# Altium PCB DYBoard_Feeder.PcbDoc
Units mm, origin at the board's own origin, x right, y up, seen from the top; angles counter-clockwise.
Board outline 152.4 x 101.6 mm, 2 copper layers (Top Layer, Bottom Layer); 20 components, 20 nets, 89 pads, 14 vias.
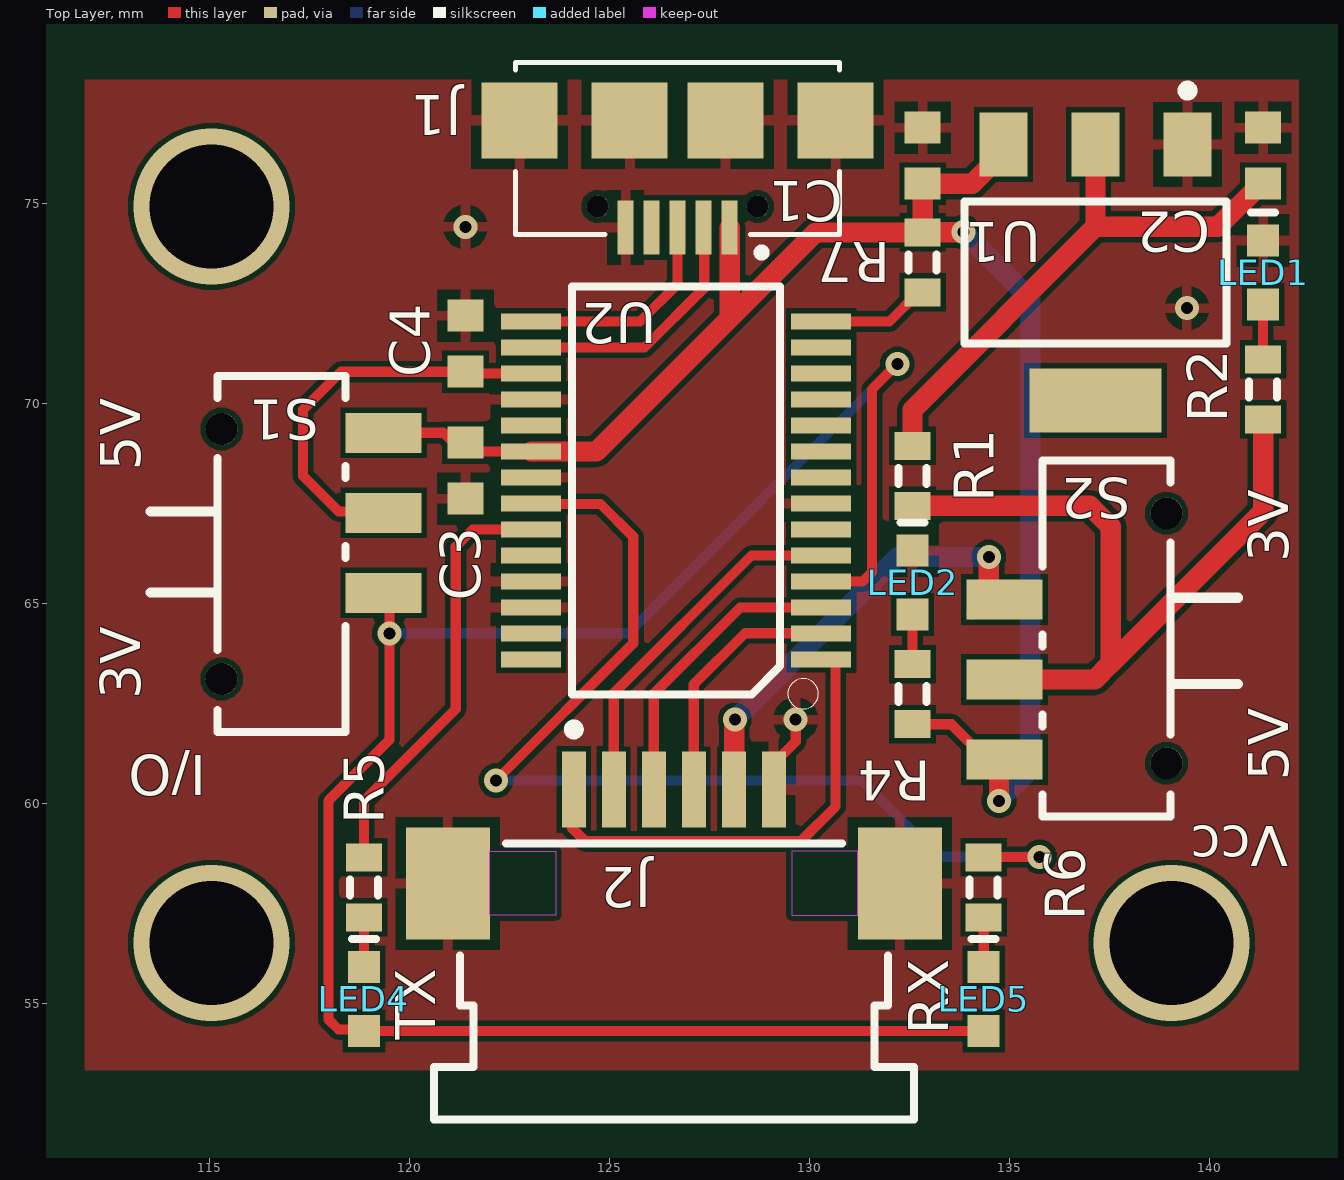
[diagram p0: Top Layer view]
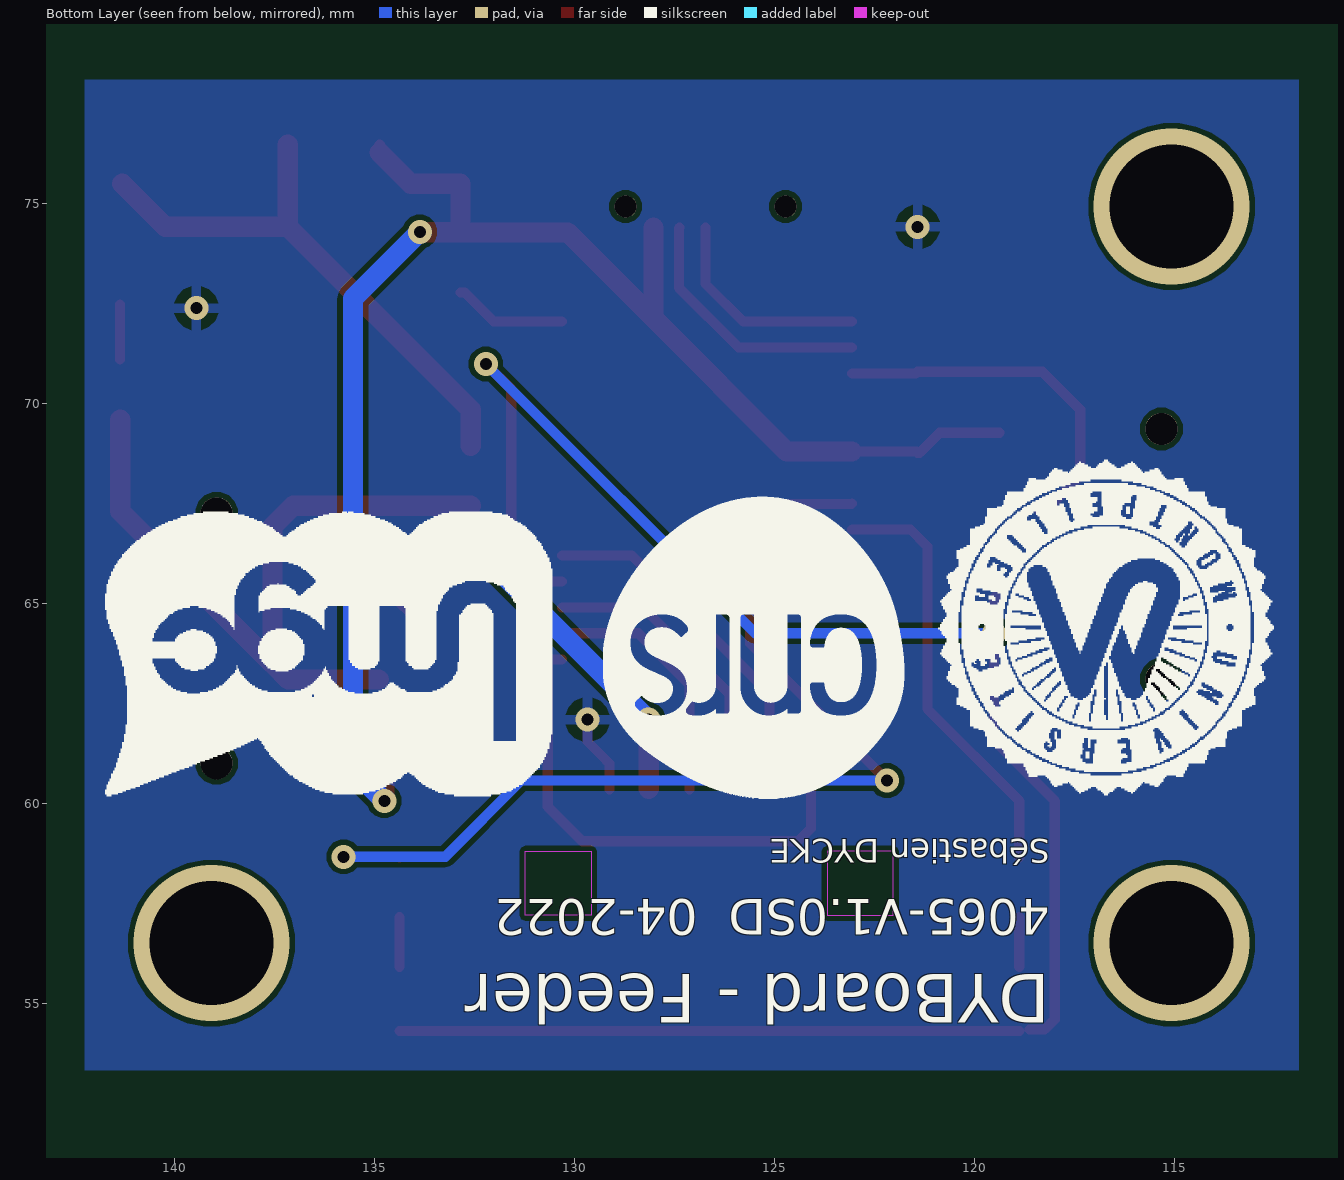
[diagram p1: Bottom Layer view, seen from below]

## Layer stack, top to bottom
Top Solder: solder mask 0.0102, Solder Resist, Dk 3.5
Top Layer: signal copper 0.0356
Dielectric 1: dielectric 0.32, FR-4, Dk 4.8
Bottom Layer: signal copper 0.0356
Bottom Solder: solder mask 0.0102, Solder Resist, Dk 3.5

## Board outline
25.4,25.4 177.8,25.4 177.8,127 25.4,127

## Design rules (kind name [scope] priority, off if disabled: settings)
Clearance [All] p1: gap=0.127 ignorepadtopadclearanceinfootprint=FALSE
PolygonConnect [All] p1: connectstyle=Relief reliefconductorwidth=0.254 reliefentries=4 polygonreliefangle="90 Angle" airgapwidth=0.254
RoutingVias [All] p1: holewidth=0.711 width=1.27 viastyle="Through Hole" minholewidth=0.711 minwidth=1.27 maxholewidth=0.711 maxwidth=1.27
SolderMaskExpansion [All] p1: expansion=0.102 istentingtop=FALSE
Width [All] p1: maxlimit=2 minlimit=0.254 preferedwidth=0.254
30 further rules are at their usual default settings.

## Components (designator, comment, footprint, x,y, rotation, side; value= is the part's Value field where it differs from the comment)
C1 "Cap Semi" 1608[0603] 132.842,76.2 r270 top value=10µF
C2 "Cap Semi" 1608[0603] 141.351,76.2 r270 top value=22µF
C3 "Cap Semi" 1608[0603] 121.412,68.326 r90 top value=10nF
C4 "Cap Semi" 1608[0603] 121.412,71.501 r270 top value=100nF
J1 "UJ2-MIBH-G-SMT-TR" CUI_UJ2-MIBH-G-SMT-TR 126.714,77.08 r180 top
J2 "52207-0633" MOLX-52207-0633 126.619,59.182 r0 top
LED1 "150060BS75000" 0603_A 141.351,73.279 r270 top
LED2 "150060BS75000" 0603_A 132.588,65.532 r270 top
LED4 "150060BS75000" 0603_A 118.872,55.118 r270 top
LED5 "150060BS75000" 0603_A 134.366,55.118 r270 top
R1 "Res3" J1-0603 132.588,68.199 r90 top value=0R
R2 "Res3" J1-0603 141.351,70.358 r90 top value=330R
R4 "Res3" J1-0603 132.588,62.738 r90 top value=330R
R5 "Res3" J1-0603 118.872,57.912 r270 top value=330R
R6 "Res3" J1-0603 134.366,57.912 r270 top value=330R
R7 "Res3" J1-0603 132.842,73.533 r90 top value=10K
S1 "450405020524" 450405020524 115.316,66.244 r270 top
S2 "450405020524" 450405020524 138.938,64.135 r90 top
U1 "AZ1117CH-3.3TRG1" FP-SOT223-MFG 137.16,73.279 r270 top
U2 "INTERFACE-FT232RL(SSOP28)" SSOP28-0.65-10.2X5.2MM 126.677,67.829 r90 top

## Footprints (in the part's own frame and the unit in brackets; to place one, negate y for a bottom-side part, rotate by r counter-clockwise, add the part's x,y. Pads: shape width x height; smd on the part's side, far side on the other; paste and mask are expansions set on the pad)
0603_A [mm] "Chip LED, 2-Leads, Body 1.6x0.8mm, IPC Medium Density"
  rect 0.8x0.8 smd: 1(-0.8,0) 2(0.8,0)
  silkscreen extent -1.5,-0.3 -1.5,0.3, body extent -0.8,-0.4 0.8,0.4, height 0.7
1608[0603] [mm] "Chip Capacitor, Body 1.6x0.8mm, IPC High Density"
  rect 0.8x0.9 smd: 1(-0.7,0) 2(0.7,0)
  body extent -0.87,-0.48 0.87,0.48, height 1.3
450405020524 [mm]
  rect 1x1.9 smd: 1(-3.03,4.05) 2(-1.03,4.05) 3(0.97,4.05)
  round 0.8 hole 0.8 unplated: ""(-3.125,0) ""(3.125,0)
  silkscreen extent -4.45,-0.1 4.45,3.1
CUI_UJ2-MIBH-G-SMT-TR [mm]
  rect 0.4x1.35 smd: 1(-1.3,2.675) 2(-0.65,2.675) 3(0,2.675) 4(0.65,2.675) 5(1.3,2.675)
  rect 1.9x1.9 smd: S1(-3.95,0) S2(-1.2,0) S3(1.2,0) S4(3.95,0)
  round 0.55 hole 0.55 unplated: ""(-2,2.15) ""(2,2.15)
  silkscreen extent -4.05,-1.45 4.05,3.4
FP-SOT223-MFG [mm]
  rect 1.6x1.2 smd paste+0 mask+0: 1(-3.2,2.3) 2(-3.2,0) 3(-3.2,-2.3)
  rect 1.6x3.3 smd paste+0 mask+0: 4(3.2,0)
  silkscreen extent -4.67,-3.27 1.78,3.27, body extent -4.1,-3.37 4.1,3.37, height 0.25
J1-0603 [mm] "Chip Resistor, Body 1.6x0.8mm, IPC High Density"
  rect 0.7x0.9 smd: 1(-0.75,0) 2(0.75,0)
  silkscreen extent -0.2,-0.35 0.2,0.35, body extent -0.85,-0.48 0.85,0.48, height 0.9
MOLX-52207-0633 [mm] "FPC Connector, 6-Leads, Right Angle, Pitch 1.0 mm, Mated Height 2.7 mm, SMT"
  rect 0.6x1.9 smd: 1(-2.5,1.175) 2(-1.5,1.175) 3(-0.5,1.175) 4(0.5,1.175) 5(1.5,1.175) 6(2.5,1.175)
  rect 2.1x2.8 smd: MP1(-5.65,-1.175) MP2(5.65,-1.175)
  Keep-Out Layer region: -4.6,-0.375 -2.95,-0.375 -2.95,-1.975 -4.6,-1.975
  Keep-Out Layer region: 4.6,-0.375 2.95,-0.375 2.95,-1.975 4.6,-1.975
  silkscreen extent -6,-7.07 6,2.8, body extent -6.15,-7.07 6.15,1.83, height 2.71
SSOP28-0.65-10.2X5.2MM [mm]
  rect 0.4x1.5 smd: 1(-4.225,-3.625) 2(-3.575,-3.625) 3(-2.925,-3.625) 4(-2.275,-3.625) 5(-1.625,-3.625) 6(-0.975,-3.625) 7(-0.325,-3.625) 8(0.325,-3.625) 9(0.975,-3.625) 10(1.625,-3.625) 11(2.275,-3.625) 12(2.925,-3.625) 13(3.575,-3.625) 14(4.225,-3.625) 15(4.225,3.625) 16(3.575,3.625) 17(2.925,3.625) 18(2.275,3.625) 19(1.625,3.625) 20(0.975,3.625) 21(0.325,3.625) 22(-0.325,3.625) 23(-0.975,3.625) 24(-1.625,3.625) 25(-2.275,3.625) 26(-2.925,3.625) 27(-3.575,3.625) 28(-4.225,3.625)
  silkscreen extent -5.46,-3.56 5.1,2.6, body extent -5.1,-3.9 5.1,3.9, height 2

## Part data
C1 C2 C3 C4: "Capacitor (Semiconductor SIM Model)", LatestRevisionDate=29-May-2009, LatestRevisionNote="IPC-7351 Footprint Added.", PackageDescription="Chip Capacitor", PackageReference=C1206, Published=8-Jun-2000, Publisher="Altium Limited"
J1: "Micro B, USB 2.0, 1.8 A, Right Angle, Surface Mount (SMT), USB Receptacle", Package=None, Availability=Warning, Check_prices=https://www.snapeda.com/parts/UJ2-MIBH-G-SMT-TR/CUI%20Devices/view-part/5487872/?ref=eda, CUI_purchase_URL=https://www.cuidevices.com/product/interconnect/connectors/usb-connectors/uj2-mibh-g-smt-tr?utm_source=snapeda.com&utm_medium=referral&utm_campaign=snapedaBOM, MF="CUI Devices", MP=UJ2-MIBH-G-SMT-TR, Price=None, Purchase-URL=https://pricing.snapeda.com/search/part/UJ2-MIBH-G-SMT-TR/?ref=eda, SnapEDA_Link=https://www.snapeda.com/parts/UJ2-MIBH-G-SMT-TR/CUI%20Devices/view-part/5487872/?ref=snap
J2: library part CMP-1241-00174-1, "1.0 mm Pitch Easy-On(TM) Type FPC Connector, 2.7 mm Mated Height, Right Angle, ZIF, SMT, Top Contact, 6 Circuits, -40 to 85 degC, ELV and RoHS Compliant, Tape and Reel", Current (Max per Contact)=1A, Manufacturer=Molex, Voltage (Max)=125V, Circuits (Loaded)=6, ComponentLink1Description="Manufacturer URL", ComponentLink1URL=http://www.molex.com/molex/index.jsp, ComponentLink2Description=Datasheet, ComponentLink2URL=http://www.molex.com/webdocs/datasheets/pdf/en-us/0522070633_FFC_FPC_CONNECTORS.pdf, ComponentLink3Description="Package Specification", ComponentLink3URL=http://www.molex.com/pdm_docs/sd/522070633_sd.pdf, Contact Position=Top, Durability (mating cycles max)=30, Entry Angle="90degrees Angle", Mated Height=2.70mm, Material - Metal="Phosphor Bronze", Material - Plating Mating="Silver, Tin-Bismuth", Material - Plating Termination="Silver, Tin-Bismuth", Mounting Technology="Surface Mount", Number of Rows=1, Orientation="Right Angle", PackageDescription="6-Lead FPC Connector, Pitch 1.0 mm", PackageReference=52207-0633, PackageVersion="Rev. B, 08/2013", Packing="Tape and Reel", PartNumber=52207-0633, PCB Locator=No, PCB Retention=Yes, Pitch - Mating Interface=1.00mm, Pitch - Termination Interface=1.00mm, Polarized to PCB=Yes, RoHS=TRUE, Stackable=No
LED1 LED2 LED4 LED5: library part CMP-1426-00003-1, "SMD mono-color Chip LED, WL-SMCW, Blue", Color=Blue, Manufacturer="Wuerth Elektronik", ComponentLink1Description="Manufacturer URL", ComponentLink1URL=http://www.we-online.com, ComponentLink2Description=Datasheet, ComponentLink2URL=http://katalog.we-online.com/led/datasheet/150060BS75000.pdf, PackageReference=0603_A, PartNumber=150060BS75000
R1 R2 R4 R5 R6 R7: "Resistor", LatestRevisionDate=29-May-2009, LatestRevisionNote="IPC-7351 Footprint Added.", PackageDescription="Chip Resistor", PackageReference=J1-0603, Published=8-Jun-2000, Publisher="Altium Limited"
S1 S2: "SMT 8.7 X 3.0 MM MINI SLIDE SWIT", Package=None, Availability=Warning, Check_prices=https://www.snapeda.com/parts/450405020524/Wurth%20Electronics%20Inc./view-part/4900805/?ref=eda, MF="WÃ¼rth Elektronik", MP=450405020524, Price=None, Purchase-URL=https://pricing.snapeda.com/search/part/450405020524/?ref=eda, SnapEDA_Link=https://www.snapeda.com/parts/450405020524/Wurth%20Electronics%20Inc./view-part/4900805/?ref=snap
U1: library part CMP-12756-000028-1, "IC REG LINEAR 3.3V 800MA SOT223", Case/Package=SOT-223, Dropout Voltage=1.2V, Max Input Voltage=15V, Max Operating Temperature=125°C, Max Output Current=1.35A, Min Current Limit=1A, Min Operating Temperature=-20°C, Output Current=800mA, Output Voltage=3.3V, Package Quantity=4000, Power Supply Rejection Ratio (PSRR)=70dB, Quiescent Current=6mA, Reference Voltage=1.262V, Accuracy=1%, Height=1.7mm, Lead Free="Lead Free", Length=6.7mm, Mount="Surface Mount", Number of Outputs=1, Number of Pins=4, Number of Regulators=1, Output Type=Fixed, Packaging="Tape and Reel", Polarity=Positive, Width=3.7mm
U2: "USB Bridge, USB to UART USB 2.0 UART Interface 28-SSOP", Package="SSOP-28 FTDI", Availability=Unavailable, Check_prices=https://www.snapeda.com/parts/FT232RL/FTDI,%20Future%20Technology%20Devices%20International%20Ltd/view-part/45080/?ref=eda, MF="FTDI, Future", MP=FT232RL, Price=None, SnapEDA_Link=https://www.snapeda.com/parts/FT232RL/FTDI,%20Future%20Technology%20Devices%20International%20Ltd/view-part/45080/?ref=snap

## Via types
v1: diameter 0.6, hole 0.3, Top Layer to Bottom Layer, 11 vias
v2: diameter 3.9, hole 3.1, Top Layer to Bottom Layer, 3 vias

## Nets (pads, with @x,y where several pads share a name; then routed paths per layer and width w, separated by ;. In a path a pad name is that pad's centre, name@x,y a point inside that pad or via, vN(x,y) a via of type N, cw(c..) or ccw(c..) an arc to the next point about the centre after c; other vN are vias at no path point)
3.3V: R1.1 R2.1 S2.2 | length 19.1
  Top Layer w0.508: R1.1 137.021,67.449 137.541,66.929 137.541,63.5 141.351,67.31 R2.1 ; S2.2 137.146,63.105 137.523,63.482
GND: C1.1 C2.1 C3.1 C4.1 J1.5 J1.S1 J1.S2 J1.S3 J1.S4 J2.6 J2.MP1 J2.MP2 LED1.1 LED2.1 U1.1 U2.7 U2.18 U2.21 U2.25 U2.26 | length 2
  Top Layer w0.254: J2.6 129.119,61.007 129.292,61.18 129.667,61.555 v1(129.667,62.103)
  other v1: 139.446,72.39 121.412,74.422
NetC2_2: C2.2 R1.2 U1.2 | length 14.1
  Top Layer w0.254: C2.2@141.301,75.5 C2.2
  Top Layer w0.508: R1.2 132.588,69.85 137.16,74.422 ; U1.2 137.16,74.422 ; C2.2@141.301,75.5 140.223,74.422 137.16,74.422
NetC4_2: C4.2 S1.2 U2.17 | length 9.2
  Top Layer w0.254: 118.364,67.31 118.237,67.31 117.348,68.199 117.348,69.85 118.299,70.801 C4.2 121.459,70.754 U2.17
NetJ1_2: J1.2 U2.16 | length 6.5
  Top Layer w0.254: U2.16 125.887,71.404 127.381,72.898 127.381,74.388 J1.2
NetJ1_3: J1.3 U2.15 | length 5.5
  Top Layer w0.254: U2.15 125.775,72.054 126.714,72.993 J1.3
NetJ2_1: J2.1 U2.1 | length 12.1
  Top Layer w0.254: J2.1 124.079,60.317 124.079,59.383 124.401,59.061 129.794,59.061 130.661,59.928 130.661,63.531 130.588,63.604 U2.1
NetJ2_2: J2.2 U2.5 | length 9
  Top Layer w0.254: J2.2 125.119,62.762 128.561,66.204 U2.5
NetJ2_3: J2.3 U2.3 | length 7.5
  Top Layer w0.254: J2.3 126.119,62.746 128.277,64.904 U2.3
NetJ2_4: J2.4 U2.2 | length 6.3
  Top Layer w0.254: J2.4 127.119,62.984 128.397,64.262 130.294,64.262 U2.2
NetJ2_5: J2.5 S2.3 | length 12
  Top Layer w0.254: J2.5 J2.5@128.131,60.369 ; v1@128.131,62.091 v1(128.143,62.103) ; S2.3@134.065,64.732 134.424,65.091 134.874,65.091 S2.3@134.493,65.472
  Top Layer w0.508: J2.5@128.131,60.369 v1@128.131,62.091 ; S2.3@134.493,65.472 v1(134.493,66.167)
  Bottom Layer w0.508: v1(128.143,62.103) 132.207,66.167 v1(134.493,66.167)
NetLED1_2: LED1.2 R2.2 | length 1.4
  Top Layer w0.254: R2.2 LED1.2
NetLED2_2: LED2.2 R4.2 | length 1.2
  Top Layer w0.254: R4.2 LED2.2
NetLED4_1: LED4.1 R5.2 | length 1.2
  Top Layer w0.254: LED4.1 R5.2
NetLED5_1: LED5.1 R6.2 | length 1.2
  Top Layer w0.254: LED5.1 R6.2
NetR5_1: R5.1 U2.23 | length 10.8
  Top Layer w0.254: R5.1 118.872,60.071 121.169,62.368 121.169,66.432 121.591,66.854 U2.23
NetR6_1: R6.1 U2.22 | length 26.2
  Top Layer w0.254: v1(122.174,60.579) 125.603,64.008 125.603,66.675 124.784,67.494 123.062,67.494 U2.22 ; R6.1 134.372,58.668 135.757,58.668 v1(135.763,58.674)
  Bottom Layer w0.254: v1(122.174,60.579) 131.318,60.579 133.223,58.674 v1(135.763,58.674)
NetR7_1: R7.1 U2.14 | length 2.8
  Top Layer w0.254: U2.14 132.013,72.054 132.742,72.783 R7.1
VCCIO: LED4.2 LED5.2 S1.3 U2.4 | length 49.9
  Top Layer w0.254: LED4.2@118.618,54.356 118.237,54.356 117.983,54.61 117.983,60.071 119.507,61.595 v1(119.507,64.262) 119.507,65.133 S1.3 ; LED4.2 LED5.2 ; U2.4 131.34,65.554 131.572,65.786 131.572,70.358 v1(132.207,70.993)
  Bottom Layer w0.254: v1(119.507,64.262) 125.476,64.262 v1(132.207,70.993)
Vusb: C1.2 C3.2 J1.1 R4.1 R7.2 S1.1 S2.1 U1.3 U2.20 | length 42.1
  Top Layer w0.254: S1.1 120.86,69.274 121.362,68.772 121.412,68.772 121.444,68.804 U2.20 ; R4.1 133.555,61.988 134.438,61.105 S2.1 S2.1@134.747,60.964 ; R7.2@132.742,74.283 R7.2 ; U1.3@134.86,76.279 U1.3
  Top Layer w0.508: U2.20 124.684,68.804 128.014,72.134 ; J1.1 128.014,72.134 ; R7.2 C1.2 134.081,75.5 U1.3@134.86,76.279 ; v1(133.858,74.295) 133.852,74.289 132.748,74.289 132.742,74.283 130.163,74.283 128.014,72.134 ; v1(134.747,60.071) S2.1@134.747,60.964
  Bottom Layer w0.508: v1(133.858,74.295) 135.53,72.623 135.53,60.854 v1(134.747,60.071)
pads on no net: J1. J1.4 S1. S2. U1.4 U2.6 U2.8 U2.9 U2.10 U2.11 U2.12 U2.13 U2.19 U2.24 U2.27 U2.28
copper on no net:
  other v2: 115.062,56.515 139.065,56.515 115.062,74.93

## Polygon pours and split planes (outlines as drawn)
GND on Bottom Layer "GND_L02_P000" (solid, pour order 0): 111.887,78.105 111.887,53.34 142.24,53.34 142.24,78.105
GND on Top Layer "GND_L01_P001" (solid, pour order 1): 111.887,53.34 111.887,78.105 142.24,78.105 142.24,53.34

## Silkscreen, mask and mechanical layers (free items; w line width, h text height)
Top Overlay:
  lines w0.254: 113.538,65.278 115.189,65.278 ; 113.538,67.31 115.189,67.31 ; 139.065,62.992 140.716,62.992 ; 139.065,65.151 140.716,65.151
  text "5V" at 113.284,68.326 h1 r90
  text "3V" at 141.986,66.04 h1 r90
  text "3V" at 113.284,62.611 h1 r90
  text "I/O" at 114.935,61.214 h1 r180
  text "5V" at 141.986,60.579 h1 r90
  text "Vcc" at 141.986,59.436 h1 r180
  text "RX" at 133.477,54.229 h1 r90
  text "TX" at 120.65,54.102 h1 r90
Bottom Overlay:
  drawing of 13 lines, arcs and shapes, not listed
  text "Sébastien DYCKE" at 118.11,59.309 h1.01 r180
  text "4065-V1.0SD  04-2022" at 118.11,57.912 h1.52 r180
  text "DYBoard - Feeder" at 118.11,56.134 h2.07 r180
Mechanical 1:
  lines w0.254: 111.887,78.105 111.887,53.34 142.24,53.34 142.24,78.105 112.014,78.105

## Text inside footprints (layer, text, board x,y; h text height)
J1: Mechanical 13 "PCB EDGE" at 121.389,78.405 h0.61 r180